# EAGLE board post_schematic_v4_charlieplex v80 (EAGLE 9.7.0)
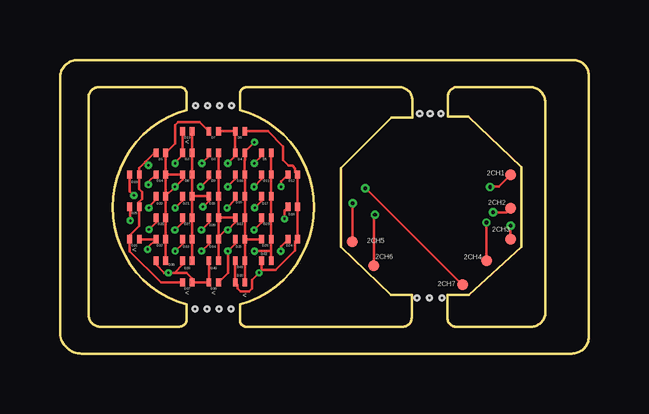
[diagram p0: board, top side]
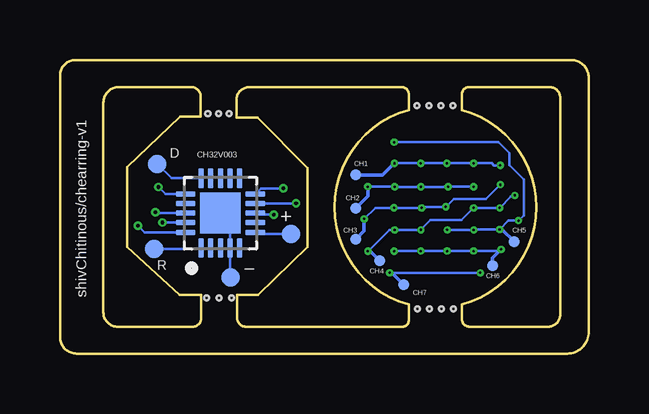
[diagram p1: board, bottom side, seen from below]

Size 22.05 x 12.25 mm. Coordinates in mm from the lower left corner, seen from the top.
Outline: 0.9,0 21.35,0 arc90 22.05,0.7 22.05,11.6 arc90 21.4,12.25 0.75,12.25 arc90 0,11.5 0,0.9 arc90 0.9,0
Outline: 20.24,10.47 20.24,1.72 arc-90 19.64,1.12 16.51,1.12 arc-90 16.16,1.47 16.16,2.45 17.06,2.45 19.24,4.45 19.24,7.78 17.04,9.88 16.18,9.88 16.18,10.72 arc-90 16.58,11.12 19.59,11.12 arc-90 20.24,10.47
Outline: 1.19,1.62 1.19,10.67 arc-90 1.64,11.12 4.99,11.12 arc-90 5.29,10.82 5.29,10.16 arc149 5.29,2.05 5.29,1.44 arc-90 4.97,1.12 1.69,1.12 arc-90 1.19,1.62
Outline: 7.79,11.12 14.14,11.12 arc-90 14.7,10.57 14.7,9.84 13.82,9.84 11.72,7.74 11.72,4.45 13.8,2.45 14.67,2.45 14.67,1.5 arc-90 14.29,1.12 7.77,1.12 arc-90 7.51,1.38 7.51,2.05 arc149 7.5,10.16 7.5,10.79 arc-90 7.79,11.12
Copper layers (1*16): Top 0.035mm / dielectric 1.5mm / Bottom 0.035mm
Design rules "Fusion Electronics Design Rules *": minimum track width 0.1mm, minimum drill 0.05mm, track to track 6mil, track to pad 6mil, pad to pad 6mil, via to via 6mil, smd to smd 6mil, copper to edge 0.1mm, drill to drill 0.05mm, minimum pad ring 10mil, minimum via ring 0.1mm, stop-mask expansion 4mil, vias tented up to drill 0mil, thermal gap 10mil
Holes 0.2 mm at 5.64,1.87 6.14,1.87 6.64,1.87 5.66,10.34 6.16,10.34 6.66,10.34 14.89,2.32 15.41,2.32 7.16,10.34 7.14,1.87 15.93,2.32 15,10.01 15.44,10.01 15.88,10.01

## Footprints (pad centres in the part's own frame; a part is rotated, then mirrored left to right if it is on the bottom)
SMALLPAD = smd 0.457 x 0.457: P$1 0,0
BIGPAD = smd 0.762 x 0.762: P$1 0,0
QFN40P300X300X90-21N = smd 0.81 x 0.22: 1 -1.455,0.8; 2 -1.455,0.4; 3 -1.455,0; 4 -1.455,-0.4; 5 -1.455,-0.8; 11 1.455,-0.8; 12 1.455,-0.4; 13 1.455,0; 14 1.455,0.4; 15 1.455,0.8 | smd 0.22 x 0.81: 6 -0.8,-1.455; 7 -0.4,-1.455; 8 0,-1.455; 9 0.4,-1.455; 10 0.8,-1.455; 16 0.8,1.455; 17 0.4,1.455; 18 0,1.455; 19 -0.4,1.455; 20 -0.8,1.455 | smd 1.7 x 1.7: 21 0,0
0201_2.4V_20MA = smd 0.2 x 0.35: A 0.2,0; K -0.2,0

## Placement (x,y rotation side)
2CH1  SMALLPAD  [SMALLPAD]  18.79,7.45 0 top
2CH2  SMALLPAD  [SMALLPAD]  18.79,6.07 0 top
2CH3  SMALLPAD  [SMALLPAD]  18.79,4.77 0 top
2CH4  SMALLPAD  [SMALLPAD]  17.79,3.87 0 top
2CH5  SMALLPAD  [SMALLPAD]  12.19,4.67 0 top
2CH6  SMALLPAD  [SMALLPAD]  13.09,3.67 0 top
2CH7  SMALLPAD  [SMALLPAD]  16.79,2.87 0 top
+  BIGPAD  [BIGPAD]  12.42,4.99 90 bottom
_  BIGPAD  [BIGPAD]  14.93,3.18 90 bottom
CH1  SMALLPAD  [SMALLPAD]  9.71,7.45 0 bottom
CH2  SMALLPAD  [SMALLPAD]  9.71,6.07 0 bottom
CH3  SMALLPAD  [SMALLPAD]  9.71,4.77 0 bottom
CH4  SMALLPAD  [SMALLPAD]  8.71,3.87 0 bottom
CH5  SMALLPAD  [SMALLPAD]  3.11,4.67 0 bottom
CH6  SMALLPAD  [SMALLPAD]  4.01,3.67 0 bottom
CH7  SMALLPAD  [SMALLPAD]  7.71,2.87 0 bottom
CH32V003  CH32V003  [QFN40P300X300X90-21N]  15.36,5.86 90 bottom
D  BIGPAD  [BIGPAD]  17.99,7.91 90 bottom
D1  0201_2.4V_20MA  [0201_2.4V_20MA]  4.21,8.37 180 top
D2  0201_2.4V_20MA  [0201_2.4V_20MA]  5.31,8.37 180 top
D3  0201_2.4V_20MA  [0201_2.4V_20MA]  6.41,8.37 180 top
D4  0201_2.4V_20MA  [0201_2.4V_20MA]  7.51,8.37 180 top
D5  0201_2.4V_20MA  [0201_2.4V_20MA]  8.61,8.37 180 top
D6  0201_2.4V_20MA  [0201_2.4V_20MA]  7.51,9.27 180 top
D7  0201_2.4V_20MA  [0201_2.4V_20MA]  6.41,9.27 180 top
D8  0201_2.4V_20MA  [0201_2.4V_20MA]  5.31,7.47 180 top
D9  0201_2.4V_20MA  [0201_2.4V_20MA]  6.41,7.47 180 top
D10  0201_2.4V_20MA  [0201_2.4V_20MA]  7.51,7.47 180 top
D11  0201_2.4V_20MA  [0201_2.4V_20MA]  8.61,7.47 180 top
D12  0201_2.4V_20MA  [0201_2.4V_20MA]  9.71,7.47 180 top
D13  0201_2.4V_20MA  [0201_2.4V_20MA]  5.31,9.27 0 top
D14  0201_2.4V_20MA  [0201_2.4V_20MA]  4.21,7.47 180 top
D15  0201_2.4V_20MA  [0201_2.4V_20MA]  6.41,6.57 180 top
D16  0201_2.4V_20MA  [0201_2.4V_20MA]  7.51,6.57 180 top
D17  0201_2.4V_20MA  [0201_2.4V_20MA]  8.61,6.57 180 top
D18  0201_2.4V_20MA  [0201_2.4V_20MA]  9.71,6.12 180 top
D19  0201_2.4V_20MA  [0201_2.4V_20MA]  3.11,7.47 180 top
D20  0201_2.4V_20MA  [0201_2.4V_20MA]  4.21,6.57 180 top
D21  0201_2.4V_20MA  [0201_2.4V_20MA]  5.31,6.57 180 top
D22  0201_2.4V_20MA  [0201_2.4V_20MA]  7.51,5.67 180 top
D23  0201_2.4V_20MA  [0201_2.4V_20MA]  8.61,5.67 180 top
D24  0201_2.4V_20MA  [0201_2.4V_20MA]  9.71,4.77 180 top
D25  0201_2.4V_20MA  [0201_2.4V_20MA]  3.11,6.12 180 top
D26  0201_2.4V_20MA  [0201_2.4V_20MA]  4.21,5.67 180 top
D27  0201_2.4V_20MA  [0201_2.4V_20MA]  5.31,5.67 180 top
D28  0201_2.4V_20MA  [0201_2.4V_20MA]  6.41,5.67 180 top
D29  0201_2.4V_20MA  [0201_2.4V_20MA]  8.61,4.77 180 top
D30  0201_2.4V_20MA  [0201_2.4V_20MA]  7.51,2.97 0 top
D31  0201_2.4V_20MA  [0201_2.4V_20MA]  3.11,4.77 0 top
D32  0201_2.4V_20MA  [0201_2.4V_20MA]  4.21,4.77 180 top
D33  0201_2.4V_20MA  [0201_2.4V_20MA]  5.31,4.77 180 top
D34  0201_2.4V_20MA  [0201_2.4V_20MA]  6.41,4.77 180 top
D35  0201_2.4V_20MA  [0201_2.4V_20MA]  7.51,4.77 180 top
D36  0201_2.4V_20MA  [0201_2.4V_20MA]  6.41,2.97 0 top
D37  0201_2.4V_20MA  [0201_2.4V_20MA]  5.31,2.97 0 top
D38  0201_2.4V_20MA  [0201_2.4V_20MA]  4.21,3.87 180 top
D39  0201_2.4V_20MA  [0201_2.4V_20MA]  5.31,3.87 180 top
D40  0201_2.4V_20MA  [0201_2.4V_20MA]  6.41,3.87 180 top
D41  0201_2.4V_20MA  [0201_2.4V_20MA]  7.51,3.87 180 top
D42  0201_2.4V_20MA  [0201_2.4V_20MA]  8.61,3.87 180 top
R  BIGPAD  [BIGPAD]  18.13,4.36 90 bottom

## Library data of the parts
2CH1-2CH7 + _ CH1-CH7 D R = CH32LEDBoardCommon
CH32V003 = CH32LEDBoardCommon; AVAILABILITY: In Stock; CHECK_PRICES: https://www.snapeda.com/parts/ATTINY816-MF/Microchip/view-part/?ref=eda; DESCRIPTION: AVR tinyAVR™ 1, Functional Safety (FuSa) Microcontroller IC 8-Bit 16MHz 8KB (8K x 8) FLASH 20-VQFN (3x3); MF: Microchip Technology; MP: ATTINY816-MF; PACKAGE: None; PRICE: None; SNAPEDA_LINK: https://www.snapeda.com/parts/ATTINY816-MF/Microchip/view-part/?ref=snap
D1-D42 = CH32LEDBoardCommon; AVAILABILITY: In Stock; CHECK_PRICES: https://www.snapeda.com/parts/APG0603CGC-TT/Kingbright/view-part/?ref=eda; DESCRIPTION: Green 571nm LED Indication - Discrete 1.97V 2-SMD, 0201; FOOTPRINT: pre_schematic_v4:LED_APG0603CGC-TT; MF: Kingbright; MP: APG0603CGC-TT; PACKAGE: 0201 Kingbright; PRICE: None; SNAPEDA_LINK: https://www.snapeda.com/parts/APG0603CGC-TT/Kingbright/view-part/?ref=snap

## Nets
CHRLY_1: CH1.P$1 D1.A D2.A D3.A D4.A D5.A D6.A D7.K D13.K D19.K D25.K D31.K D37.K
CHRLY_2: CH2.P$1 D1.K D7.A D8.A D9.A D10.A D11.A D12.A D14.K D20.K D26.K D32.K D38.K
CHRLY_3: CH3.P$1 D2.K D8.K D13.A D14.A D15.A D16.A D17.A D18.A D21.K D27.K D33.K D39.K
CHRLY_4: CH4.P$1 D3.K D9.K D15.K D19.A D20.A D21.A D22.A D23.A D24.A D28.K D34.K D40.K
CHRLY_5: CH5.P$1 D4.K D10.K D16.K D22.K D25.A D26.A D27.A D28.A D29.A D30.A D35.K D41.K
CHRLY_6: CH6.P$1 D5.K D11.K D17.K D23.K D29.K D31.A D32.A D33.A D34.A D35.A D36.A D42.K
CHRLY_7: CH7.P$1 D6.K D12.K D18.K D24.K D30.K D36.K D37.A D38.A D39.A D40.A D41.A D42.A
N$1: +.P$1 CH32V003.6
N$2: _.P$1 CH32V003.4 CH32V003.21
N$3: CH32V003.1 R.P$1
N$4: CH32V003.15 D.P$1
N$5: 2CH1.P$1 CH32V003.16
N$6: 2CH2.P$1 CH32V003.18
N$7: 2CH3.P$1 CH32V003.20
N$8: 2CH4.P$1 CH32V003.19
N$9: 2CH6.P$1 CH32V003.8
N$10: 2CH5.P$1 CH32V003.9
N$11: 2CH7.P$1 CH32V003.10

## Tracks (layer width: path | path; a pad name or v marks a point on that pad's centre or on a via)
CHRLY_1  (via drill 0.1 pad 0.1, 0.1 pad 0.11)
  Top 0.1: D1.A 3.93,8.37 3.55,7.99 | D7.K D6.A D4.A 7.31,8.25 v7,7.94 | D13.K 5.11,9.11 D2.A 5.11,8.28 4.8,7.98 v4.8,7.94 | D5.A 8.41,8.25 v8.1,7.94 | v5.91,7.94 6.21,8.24 D3.A | D37.K 4.21,2.97 2.91,4.27 D31.K 2.91,4.93 3.31,5.33 D25.K 3.31,6.33 3.43,6.45 3.43,6.74 3.31,6.87 D19.K 3.31,7.75 3.55,7.99 | 3.55,7.99 v3.69,7.85
  Bottom 0.1: v8.1,7.94 v7,7.94 v5.91,7.94 v4.8,7.94 4.05,7.94 3.96,7.85 v3.69,7.85
  Bottom 0.152: CH1.P$1 8.59,7.45 v8.1,7.94
CHRLY_2  (via drill 0.1 pad 0.1, 0.1 pad 0.11)
  Top 0.1: D20.K D14.K | D20.K D26.K D32.K D38.K | D14.K D1.K 4.81,8.77 4.81,9.53 4.93,9.65 5.83,9.65 D7.A | v4.8,6.96 5.11,7.26 D8.A D14.K | v4.8,6.96 D20.K | D9.A 6.21,7.31 v5.86,6.96 | D11.A 8.41,7.27 v8.09,6.96 | v4.8,6.96 | D10.A 7.31,7.27 v7,6.96 | D12.A 9.22,7.18 v9.22,6.96
  Bottom 0.1: v4.8,6.96 v5.85,6.96 v5.86,6.96 v6.99,6.96 v7,6.96 v8.09,6.96 8.1,6.96 v9.21,6.96 v9.22,6.96
  Bottom 0.152: CH2.P$1 9.21,6.57 v9.21,6.96
CHRLY_3  (via drill 0.1 pad 0.1)
  Top 0.1: D21.K D27.K D33.K D39.K | D21.K D15.A 6.21,6.37 v5.96,6.12 | D13.A D2.K D8.K 5.51,7.17 5.51,6.78 5.51,6.77 D21.K | D17.A 8.41,6.37 v8.12,6.08 | v9.37,5.62 9.37,5.98 D18.A | v3.69,7.05 3.69,7.15 D14.A | D16.A 7.31,6.42 v6.96,6.08
  Bottom 0.1: v9.37,5.62 8.9,6.08 v8.12,6.08 v6.96,6.08 6.92,6.12 v5.96,6.12 5.63,6.45 4.28,6.45 v3.69,7.05
  Bottom 0.152: CH3.P$1 9.37,5.11 v9.37,5.62
CHRLY_4  (via drill 0.1 pad 0.1)
  Top 0.1: 6.61,4.87 D34.K D40.K | 6.61,4.87 D28.K | D3.K D9.K D15.K D28.K | v4.8,6.08 5.11,6.38 D21.A | v7,5.16 7.31,5.46 D22.A D28.K | 6.61,4.87 6.9,5.16 v7,5.16 | D24.A 9.21,4.47 v9.21,4.27 | D20.A 4.01,6.43 3.71,6.13 v3.71,6.08 | D23.A 8.41,5.47 v8.09,5.16 | v7,5.16 | D19.A 2.91,6.77 v3.08,6.6
  Bottom 0.1: v9.21,4.27 8.32,5.16 8.12,5.16 8.11,5.16 | 8.11,5.16 v8.09,5.16 | 8.11,5.16 8.1,5.16 v7,5.16 7,5.18 6.61,5.57 5.31,5.57 v4.8,6.08 v3.71,6.08 3.24,6.55 3.13,6.55 v3.08,6.6
  Bottom 0.152: v9.21,4.27 9.11,4.27 CH4.P$1
CHRLY_5  (via drill 0.1 pad 0.1)
  Top 0.1: D35.K D22.K D16.K D10.K 7.71,7.57 7.71,7.58 7.71,8.07 D4.K 7.71,8.42 v8.11,8.82 | D27.A 5.11,5.47 v4.79,5.16 | D28.A 6.21,5.47 v5.9,5.16 | D26.A 4.01,5.47 v3.71,5.18 | D35.K D29.A | D25.A 2.93,6.1 v2.93,5.55 | D35.K D41.K D30.A
  Bottom 0.1: v5.9,5.16 v5.89,5.16 v4.79,5.16 4.77,5.18 3.81,5.18 v3.71,5.18 3.34,5.55 v2.93,5.55 2.71,5.77 2.71,7.27 3.31,7.87 3.31,8.37 3.76,8.82 v8.11,8.82
  Bottom 0.152: CH5.P$1 3.62,5.18 3.81,5.18
CHRLY_6  (via drill 0.1 pad 0.1, 0.1 pad 0.11)
  Top 0.1: D33.A 5.11,4.58 v4.8,4.28 | D34.A 6.21,4.58 v5.9,4.28 | D35.A 7.31,4.58 v7,4.28 v7.01,4.27 7.01,3.37 D36.A | D31.A D32.A 3.66,4.42 v3.66,4.35 | D5.K D11.K D17.K D23.K 8.81,5.27 8.81,4.98 8.81,4.97 D29.K 8.81,4.27 | 8.81,4.27 D42.K | v8.11,4.27 8.81,4.27
  Bottom 0.1: v8.11,4.27 v8.1,4.28 v7,4.28 v5.9,4.28 v4.8,4.28 3.73,4.28 v3.66,4.35
  Bottom 0.152: CH6.P$1 4.01,4 v3.66,4.35
CHRLY_7  (via drill 0.1 pad 0.1, 0.1 pad 0.11)
  Top 0.1: D41.A D30.K 7.41,2.87 7.41,2.71 7.53,2.59 7.89,2.59 8.01,2.71 8.01,3.08 v8.3,3.37 | D40.A D36.K D37.A 5.51,3.13 5.27,3.37 4.77,3.37 | D6.K 8.67,9.27 9.31,8.64 9.31,8.07 9.53,7.85 9.69,7.85 9.81,7.73 9.81,7.57 D12.K D18.K D24.K 9.81,4.67 9.81,4.31 8.99,3.49 8.43,3.49 v8.3,3.37 | 4.77,3.37 v4.52,3.37 4.35,3.37 4.01,3.71 D38.A | 4.77,3.37 5.11,3.71 D39.A | D42.A 8.41,3.48 v8.3,3.37
  Bottom 0.1: v8.3,3.37 v4.52,3.37
  Bottom 0.152: CH7.P$1 8.21,3.37 v8.3,3.37
N$1
  Bottom 0.1: CH32V003.6 13.84,5 +.P$1
N$2
  Bottom 0.1: _.P$1 14.96,3.21 CH32V003.4 14.96,5.46 CH32V003.21
N$3
  Bottom 0.1: R.P$1 16.2,4.36 CH32V003.1
N$4
  Bottom 0.1: D.P$1 17.39,7.31 CH32V003.15
N$5  (via drill 0.15 pad 0.2)
  Top 0.1: 2CH1.P$1 18.31,6.97 17.94,6.97 v17.94,6.95
  Bottom 0.1: v17.94,6.95 17.65,6.66 CH32V003.16
N$6  (via drill 0.15 pad 0.2)
  Top 0.1: 2CH2.P$1 18.61,5.89 v18.07,5.89
  Bottom 0.1: v18.07,5.89 18.04,5.86 CH32V003.18
N$7  (via drill 0.15 pad 0.2)
  Top 0.1: 2CH3.P$1 18.79,5.3 18.8,5.31 v18.8,5.34
  Bottom 0.1: v18.8,5.34 18.52,5.06 CH32V003.20
N$8  (via drill 0.15 pad 0.2)
  Top 0.1: v17.78,5.47 17.79,5.46 2CH4.P$1
  Bottom 0.1: v17.78,5.47 v17.77,5.46 CH32V003.19
N$9  (via drill 0.15 pad 0.2)
  Top 0.1: 2CH6.P$1 13.09,5.75 v13.14,5.79
  Bottom 0.1: v13.14,5.79 13.84,5.79 CH32V003.8
N$10  (via drill 0.15 pad 0.2)
  Top 0.1: 2CH5.P$1 12.19,6.25 v12.2,6.26
  Bottom 0.1: CH32V003.9 v12.2,6.26
N$11  (via drill 0.15 pad 0.2)
  Top 0.1: 2CH7.P$1 12.77,6.89 v12.73,6.89
  Bottom 0.1: v12.73,6.89 13.67,6.89 CH32V003.10

## Text on the board
bPlace: shivChitinous/chearring-v1
tNames: < | < | < | < | <